# Altium PCB PCB2.PcbDoc
Units mm, origin at the board's own origin, x right, y up, seen from the top; angles counter-clockwise.
Board outline 80 x 60 mm, 2 copper layers (Top Layer, Bottom Layer); 28 components, 32 nets, 148 pads, 19 vias.
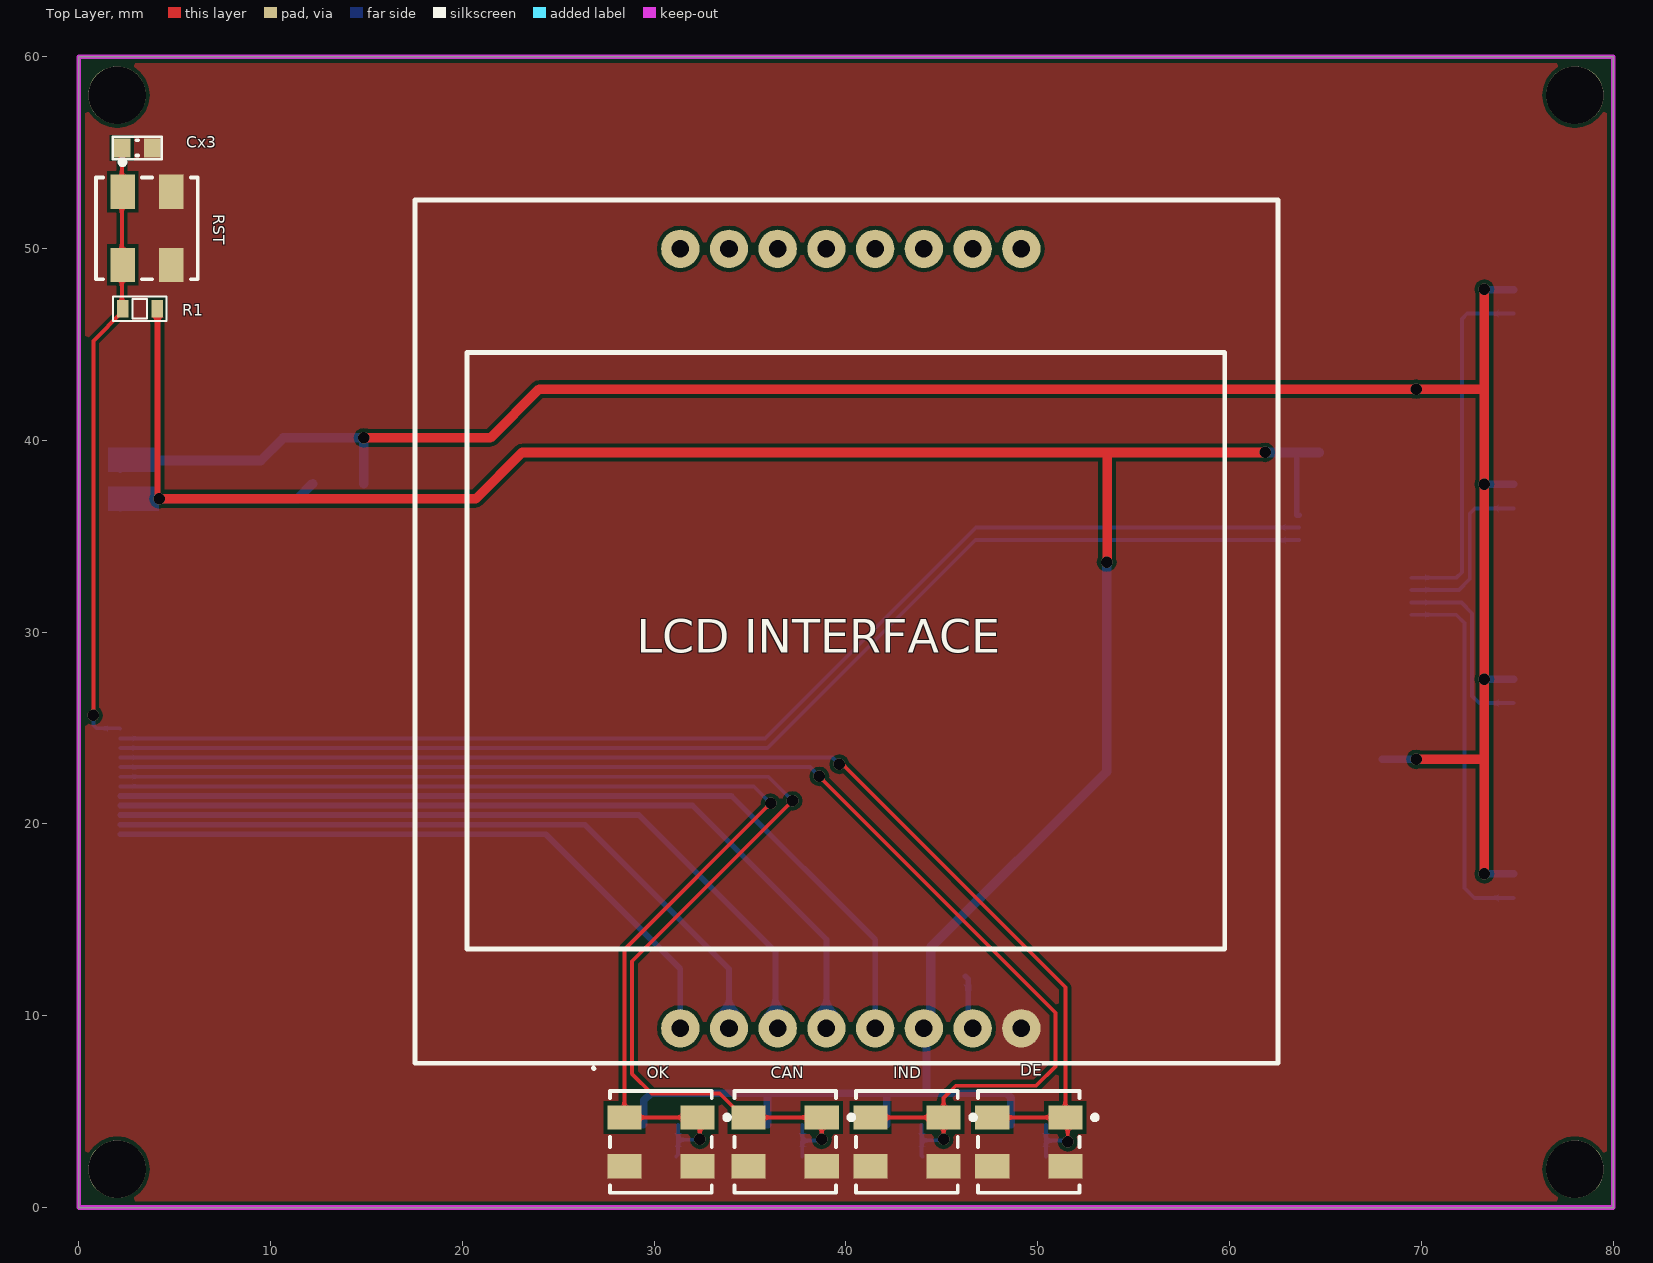
[diagram p0: Top Layer view]
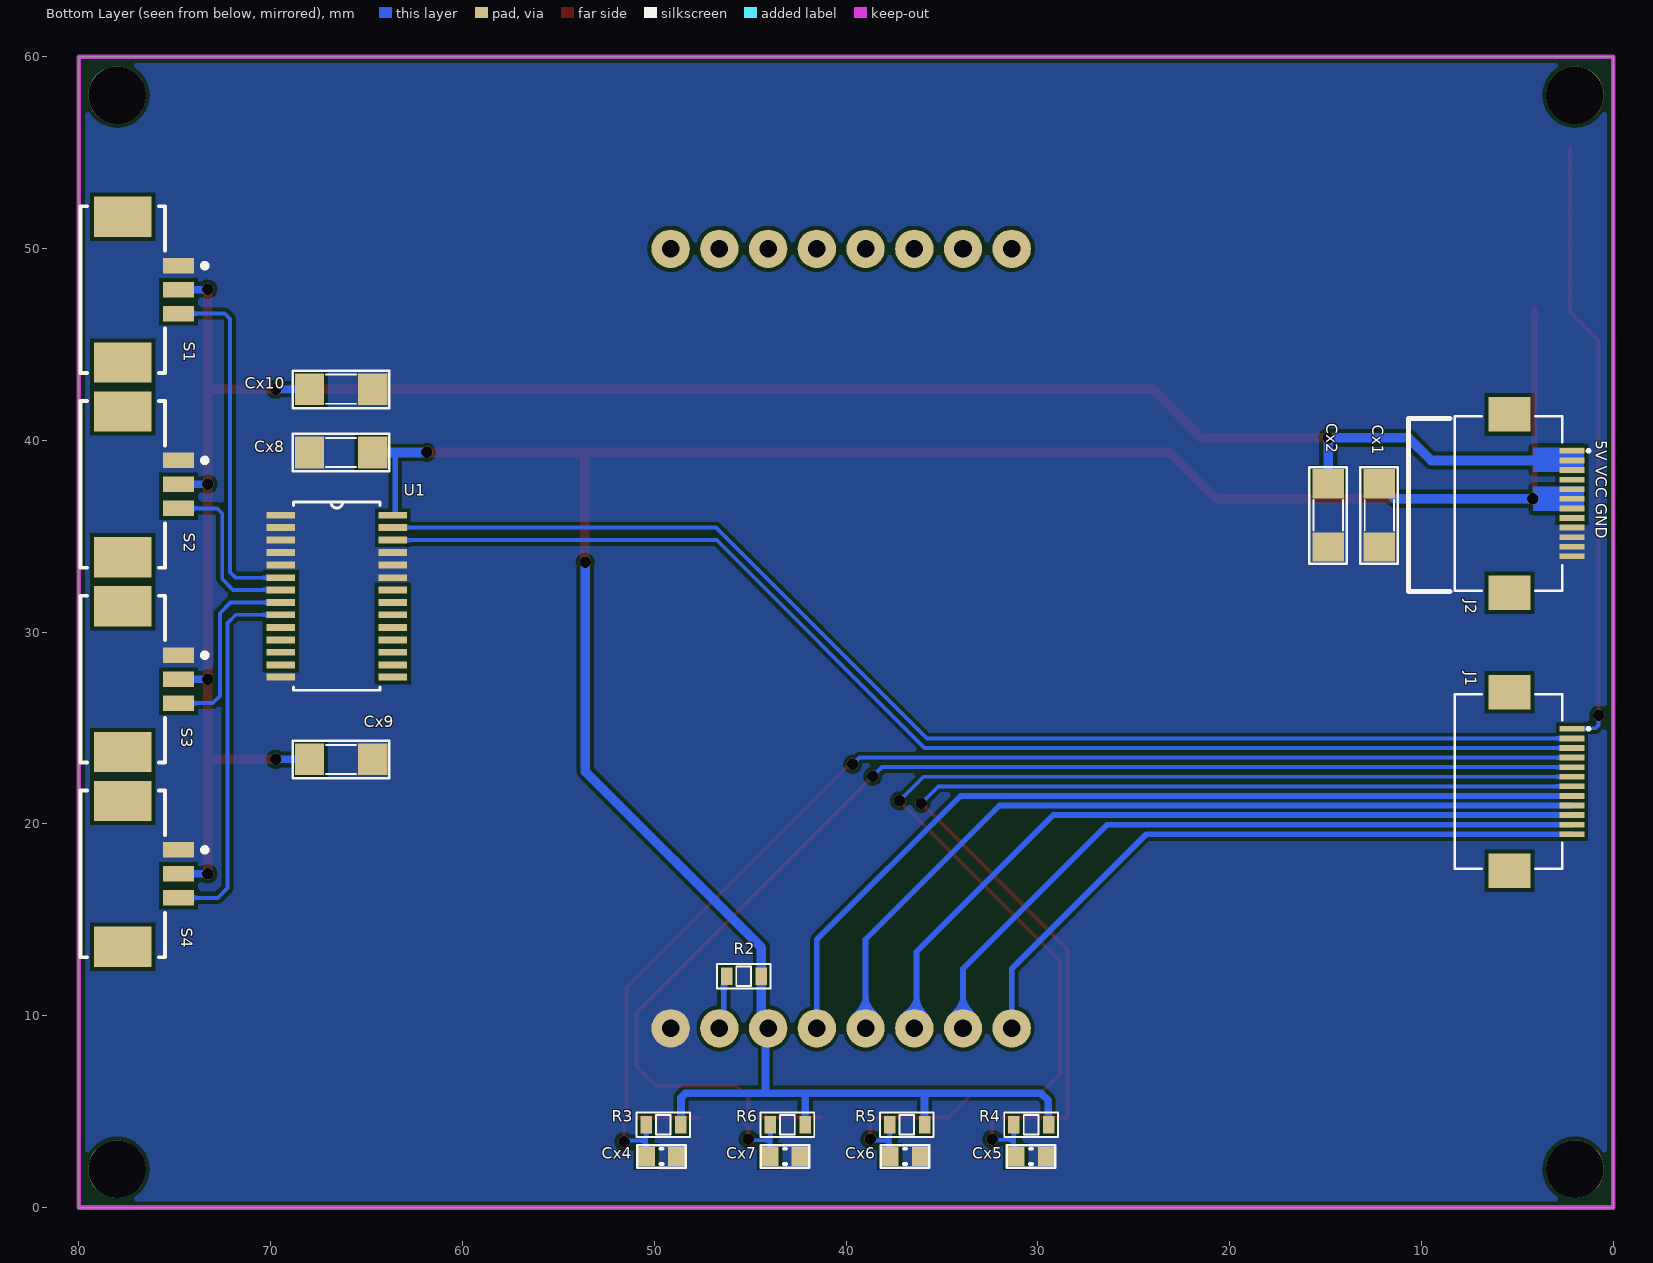
[diagram p1: Bottom Layer view, seen from below]
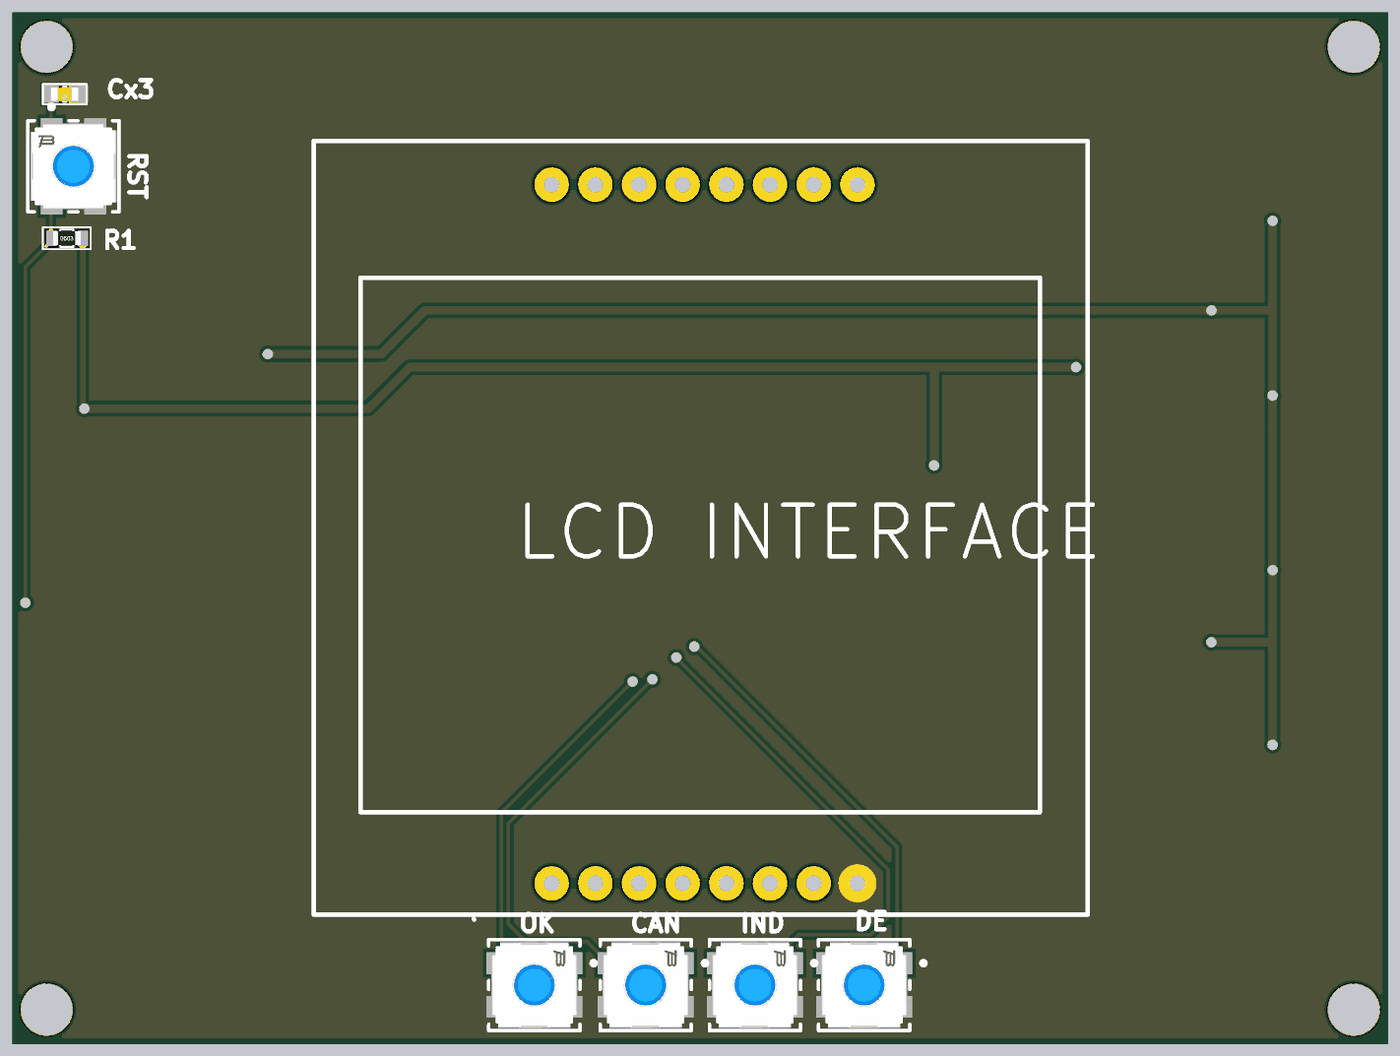
[diagram p2: 3D render of the assembled board from above, using the file's embedded part models]
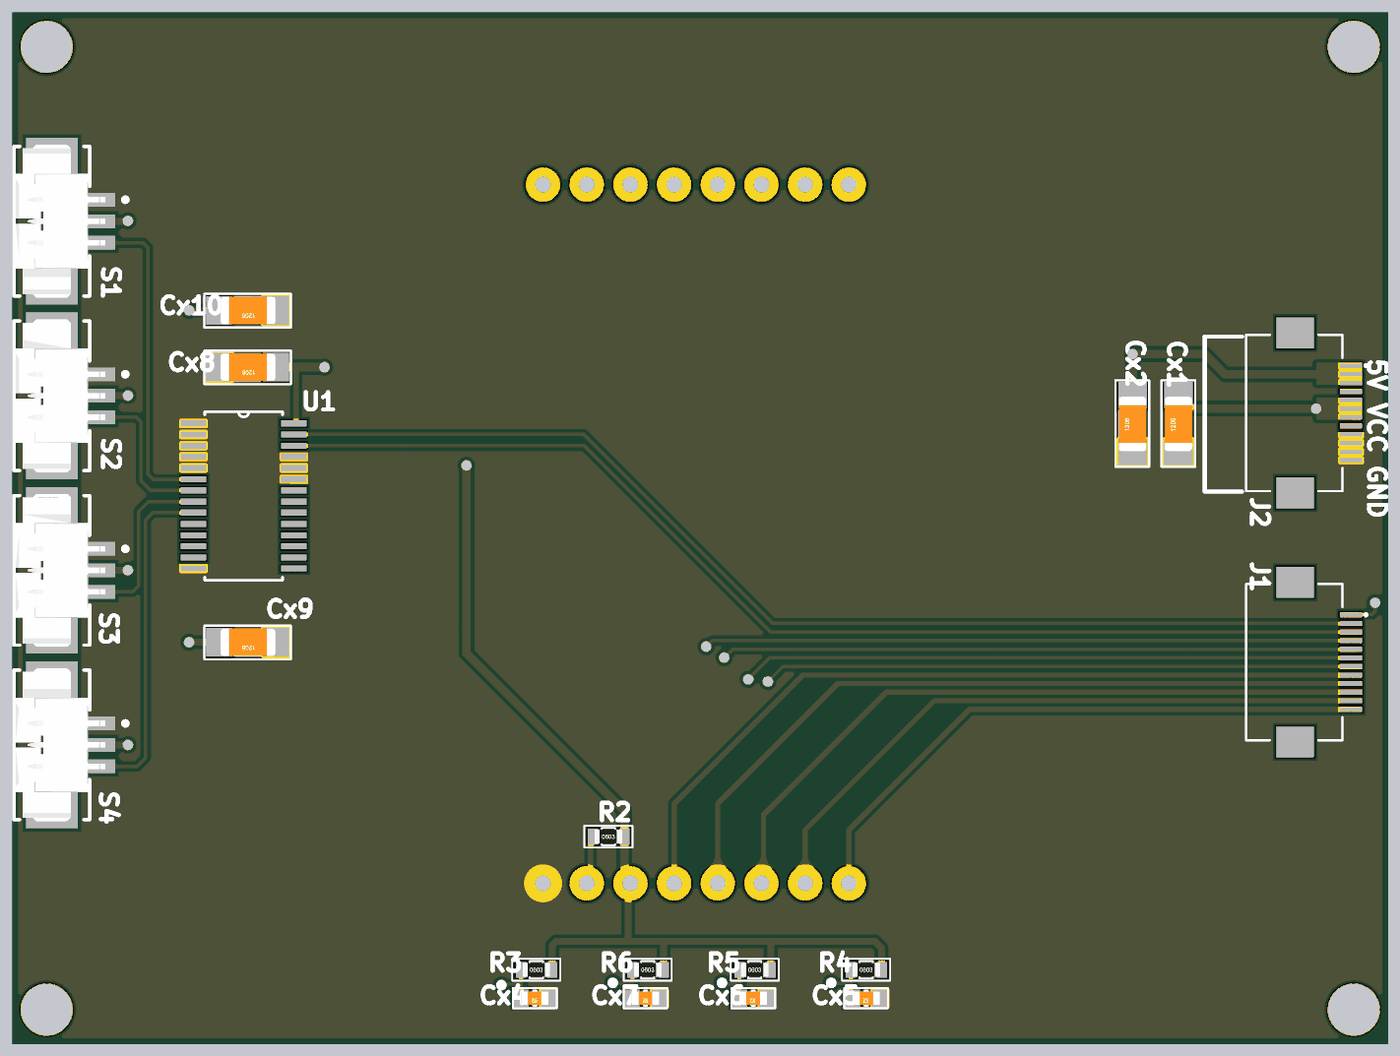
[diagram p3: 3D render of the assembled board from below, using the file's embedded part models]

## Layer stack, top to bottom
Top Solder: solder mask 0.0102, Solder Resist, Dk 3.5
Top Layer: signal copper 0.0356
Dielectric 1: dielectric 0.32, FR-4, Dk 4.8
Bottom Layer: signal copper 0.0356
Bottom Solder: solder mask 0.0102, Solder Resist, Dk 3.5

## Board outline
0,0 0,60 80,60 80,0

## Design rules (kind name [scope] priority, off if disabled: settings)
Clearance [All] p1: gap=0.2 ignorepadtopadclearanceinfootprint=FALSE
PlaneClearance [All] p1: clearance=0.5
PlaneConnect [All] p1: planeconnectstyle=Direct reliefexpansion=0.5 reliefentries=4 reliefconductorwidth=0.5 reliefairgap=0.5
PolygonConnect [All] p1: connectstyle=Direct reliefconductorwidth=0.254 reliefentries=4 polygonreliefangle="90 Angle" airgapwidth=0.254
RoutingVias [All] p1: holewidth=0.6 width=0.4 viastyle="Through Hole" minholewidth=0.6 minwidth=0.4 maxholewidth=0.6 maxwidth=0.4
SolderMaskExpansion [All] p1: expansion=0.102 istentingtop=FALSE
Width mcu [InNetClass('mcu')] p1: maxlimit=0.2 minlimit=0.2 preferedwidth=0.2
Width servo [InNetClass('SIGN_SERVO')] p2: maxlimit=0.2 minlimit=0.2 preferedwidth=0.2
Width BUTTON [InNetClass('BUTTON')] p3: maxlimit=0.3 minlimit=0.2 preferedwidth=0.3
Width lcd [InNetClass('LCD')] p4: maxlimit=0.3 minlimit=0.2 preferedwidth=0.3
Width p [InNetClass('POWER')] p5: maxlimit=0.5 minlimit=0.3 preferedwidth=0.4
28 further rules are at their usual default settings.

## Classes and differential pairs
net class mcu: EN SCL SDA
net class SIGN_SERVO: SERVO1 SeRVO2 SERVO3 SERVO4 SERVO5 SERVO6 SERVO7 SERVO8 SERVO9 SERVO10 SERVO11 SERVO12 SERVO13 SERVO14 SERVO15 SERVO16
component class Sheet3: Cx9 Cx10 S1 S2 S3 S4 U1
net class POWER: +5 VCC
net class BUTTON: SW_CANCEL SW_DE SW_IND SW_OK
net class LCD: LCD_BL LCD_CE LCD_CLK LCD_DC LCD_DIN LCD_RST
component class Sheet2: CAN Cx5 Cx6 Cx9 Cx10 DE IND J1 J2 OK R1 R3 R4 R5 R6 rst

## Components (designator, comment, footprint, x,y, rotation, side; value= is the part's Value field where it differs from the comment)
CAN "7914J-1-000" Bourns_Inc_0_MFG 36.83,3.429 r270 top (schematic designator SW5)
Cx1 "22u/10v" CN-SMD-1206 12.192,36.068 r90 bottom value=33pF
Cx2 "22u/10v" CN-SMD-1206 14.859,36.068 r90 bottom value=33pF
Cx3 "104" CN-SMD-0603 3.048,55.245 r180 top value=33pF
Cx4 "104" CN-SMD-0603 49.619,2.667 r0 bottom value=33pF
Cx5 "104" CN-SMD-0603 30.353,2.667 r0 bottom value=33pF
Cx6 "104" CN-SMD-0603 36.919,2.667 r0 bottom value=33pF
Cx7 "104" CN-SMD-0603 43.18,2.667 r0 bottom value=33pF
Cx8 "22u/10v" CN-SMD-1206 66.294,39.37 r0 bottom value=33pF
Cx9 "22u/10v" CN-SMD-1206 66.294,23.368 r0 bottom value=33pF
Cx10 "22u/10v" CN-SMD-1206 66.294,42.672 r0 bottom value=33pF
DE "7914J-1-000" Bourns_Inc_0_MFG 49.53,3.429 r270 top (schematic designator SW4)
IND "7914J-1-000" Bourns_Inc_0_MFG 43.18,3.429 r270 top (schematic designator SW3)
J1 "FH12-12S-0.5SH(55)" HIROSE_FH12-12S-0.5SH(55) 2.159,22.213 r270 bottom
J2 "FH12-12S-0.5SH(55)" HIROSE_FH12-12S-0.5SH(55) 2.159,36.703 r270 bottom
OK "7914J-1-000" Bourns_Inc_0_MFG 30.353,3.429 r270 top (schematic designator SW2)
R1 "10k" RES-SMD-0603 3.175,46.863 r0 top
R2 "220R" RES-SMD-0603 45.339,12.065 r180 bottom
R3 "10k" RES-SMD-0603 49.53,4.318 r180 bottom
R4 "10k" RES-SMD-0603 30.353,4.318 r180 bottom
R5 "10k" RES-SMD-0603 36.83,4.318 r180 bottom
R6 "10k" RES-SMD-0603 43.053,4.318 r180 bottom
RST "7914J-1-000" Bourns_Inc_0_MFG 3.556,51.054 r0 top (schematic designator SW1)
S1 "53261-0371" Molex_0_MFG 77.703,47.859 r270 bottom (schematic designator J3)
S2 "53261-0371" Molex_0_MFG 77.703,37.706 r270 bottom (schematic designator J4)
S3 "53261-0371" Molex_0_MFG 77.703,27.552 r270 bottom (schematic designator J5)
S4 "53261-0371" Molex_0_MFG 77.703,17.399 r270 bottom (schematic designator J6)
U1 "PCA9685PW,112" SOP65P640X110-28N 66.548,31.877 r180 bottom

## Footprints (in the part's own frame and the unit in brackets; to place one, negate y for a bottom-side part, rotate by r counter-clockwise, add the part's x,y. Pads: shape width x height; smd on the part's side, far side on the other; paste and mask are expansions set on the pad)
Bourns_Inc_0_MFG [mm]
  rect 1.27x1.78 smd paste+0 mask+0: 1_1-(-1.27,1.905) 1_2+(1.27,1.905) 2_1-(-1.27,-1.905) 2_2+(1.27,-1.905)
  silkscreen extent -2.65,-2.65 2.65,3.57, body extent -2.75,-2.9 2.75,2.9, height 0.25
CN-SMD-0603 [mm]
  rect 0.9x1 smd: 1(-0.8,0) 2(0.8,0)
  silkscreen extent -1.27,-0.58 1.27,0.58, body extent -0.8,-0.4 0.8,0.4, height 0.3
CN-SMD-1206 [mil]
  rect 60x65 smd: 1(-64,0) 2(66,0)
  silkscreen extent -98,-38 100,39, body extent -63,-31 63,31, height 40
HIROSE_FH12-12S-0.5SH(55) [mm]
  rect 0.3x1.3 smd paste-2: 1(-2.75,0) 2(-2.25,0) 3(-1.75,0) 4(-1.25,0) 5(-0.75,0) 6(-0.25,0) 7(0.25,0) 8(0.75,0) 9(1.25,0) 10(1.75,0) 11(2.25,0) 12(2.75,0)
  rect 1.8x2.2 smd: S1(-4.65,-3.25) S2(4.65,-3.25)
  silkscreen extent -4.55,-6.1 4.55,0.94
Molex_0_MFG [mm]
  rect 0.8x1.6 smd paste+0 mask+0: 1(-1.25,2.9) 2(0,2.9) 3(1.25,2.9)
  rect 2.1x3 smd paste+0 mask+0: 4(-3.8,0) 5(3.8,0)
  silkscreen extent -4.35,-2.2 4.35,4.4, body extent -4.45,-2.1 4.45,3.1, height 3.6
RES-SMD-0603 [mm]
  rect 0.6x0.9 smd: 1(-0.889,0) 2(0.927,0)
  silkscreen extent -1.4,-0.64 1.4,0.64, body extent -0.8,-0.4 0.8,0.4, height 0.43
SOP65P640X110-28N [mil]
  rect 58x14 smd: 1(-115,166) 2(-115,141) 3(-115,115) 4(-115,90) 5(-115,64) 6(-115,38) 7(-115,13) 8(-115,-13) 9(-115,-38) 10(-115,-64) 11(-115,-90) 12(-115,-115) 13(-115,-141) 14(-115,-166) 15(115,-166) 16(115,-141) 17(115,-115) 18(115,-90) 19(115,-64) 20(115,-38) 21(115,-13) 22(115,13) 23(115,38) 24(115,64) 25(115,90) 26(115,115) 27(115,141) 28(115,166)
  silkscreen extent -89,-193 89,193

## Part data
Cx1 Cx2 Cx3 Cx4 Cx5 Cx6 Cx7 Cx8 Cx9 Cx10: library part CN
J1 J2: "12 Position FFC, FPC Connector Contacts, Bottom 0.020 _0.50mm_ Surface Mount, Right Angle", Package=None, Availability=Unavailable, MF=Hirose, MP=FH12-12S-0.5SH_55_, Price=None, SnapEDA_Link=https://www.snapeda.com/parts/FH12-12S-0.5SH%2855%29/Hirose%20Electric%20Co%20Ltd/view-part/110249/?ref=snap
R1 R2 R3 R4 R5 R6: library part Res-SMD, "Resistor", Manufacturer="Generic Components", Class=Passive, Published=08/06/2000, Publisher="Altium Hobart Technology Centre"
U1: "LED Driver IC 16 Output Linear PWM Dimming 25mA 28-TSSOP", Package="TSSOP-28 NXP Semiconductors", Check_prices=https://www.snapeda.com/parts/PCA9685PW,112/NXP%20USA%20Inc./view-part/550390/?ref=eda, Digi-Key_Part_Number=568-8366-5-ND, MF="NXP USA", MP=PCA9685PW,112, Purchase-URL=https://pricing.snapeda.com/search/part/PCA9685PW,112/?ref=eda, SnapEDA_Link=https://www.snapeda.com/parts/PCA9685PW,112/NXP%20USA%20Inc./view-part/550390/?ref=snap

## Free pads (board coordinates)
  round 2 hole 0.914: 1(31.36,9.345) 2(33.9,9.345) 3(36.44,9.345) 4(38.98,9.345) 5(41.52,9.345) 6(44.06,9.345) 7(46.6,9.345) 8(49.14,9.345) 9(49.14,49.985) 10(46.6,49.985) 11(44.06,49.985) 12(41.52,49.985) 13(38.98,49.985) 14(36.44,49.985) 15(33.9,49.985) 16(31.36,49.985)
  round 3 hole 3: 17(2,2) 18(2,58) 19(78,58) 20(78,2)

## Via types
v1: diameter 0.6, hole 0.6, Top Layer to Bottom Layer, tented both sides, 19 vias

## Nets (pads, with @x,y where several pads share a name; then routed paths per layer and width w, separated by ;. In a path a pad name is that pad's centre, name@x,y a point inside that pad or via, vN(x,y) a via of type N, cw(c..) or ccw(c..) an arc to the next point about the centre after c; other vN are vias at no path point)
+5: Cx2.2 Cx9.2 Cx10.2 J2.1 J2.2 J2.3 S1.2 S2.2 S3.2 S4.2 | length 119.7
  Top Layer w0.5: v1(14.859,40.132) 21.463,40.132 24.003,42.672 v1(69.723,42.672) 73.152,42.672 73.279,42.799 ; v1(69.723,23.368) 73.279,23.368 ; v1(73.279,17.399) 73.279,23.368 ; v1(73.279,47.879) 73.279,42.799 ; 73.279,23.368 v1(73.279,27.559) v1(73.279,37.719) 73.279,42.799
  Bottom Layer w0.3: J2.3 J2.2 J2.1
  Bottom Layer w0.4: Cx9.2 v1(69.723,23.368) ; Cx10.2 v1(69.723,42.672) ; v1(73.279,17.399) S4.2 ; v1(73.279,27.559) 73.286,27.552 S3.2 ; v1(73.279,37.719) 73.292,37.706 S2.2 ; v1@73.279,47.859 S1.2
  Bottom Layer w0.5: J2.2 9.489,38.953 10.668,40.132 v1(14.859,40.132) Cx2.2
EN: Cx3.2 J1.1 R1.1 RST.1_1- RST.2_1- | length 32.2
  Top Layer w0.2: v1(0.762,25.663) 0.762,45.189 2.286,46.713 R1.1 2.248,46.901 Cx3.2
  Bottom Layer w0.2: v1(0.762,25.663) 0.762,25.146 0.917,24.991 2.131,24.991 J1.1
GND: CAN.1_2+ CAN.2_2+ Cx1.1 Cx2.1 Cx3.1 Cx4.1 Cx5.1 Cx6.1 Cx7.1 Cx8.2 Cx9.1 Cx10.1 DE.1_2+ DE.2_2+ IND.1_2+ IND.2_2+ J2.9 J2.10 J2.11 J2.12 OK.1_2+ OK.2_2+ pad.8 RST.1_2+ RST.2_2+ S1.1 S2.1 S3.1 S4.1 U1.1 U1.2 U1.3 U1.4 U1.5 U1.14 U1.23 U1.24 U1.25
LCD_BL: pad.7 R2.1 | length 2.9
  Bottom Layer w0.3: R2.1 46.378,11.915 46.378,9.568 pad.7
LCD_CE: J1.11 pad.2 | length 38
  Bottom Layer w0.3: J1.11 26.392,19.963 33.9,12.455 pad.2
LCD_CLK: J1.8 pad.5 | length 47.1
  Bottom Layer w0.3: J1.8 34.036,21.463 41.52,13.979 pad.5
LCD_DC: J1.10 pad.3 | length 41.2
  Bottom Layer w0.3: J1.10 29.194,20.463 36.322,13.335 36.322,9.464 pad.3
LCD_DIN: J1.9 pad.4 | length 44.3
  Bottom Layer w0.3: J1.9 31.996,20.963 38.98,13.979 pad.4
LCD_RST: J1.12 pad.1 | length 35.2
  Bottom Layer w0.3: J1.12 24.352,19.463 31.36,12.455 pad.1
SCL: J1.3 U1.26 | length 66
  Bottom Layer w0.2: J1.3 35.901,23.963 46.736,34.798 U1.26
SDA: J1.2 U1.27 | length 66
  Bottom Layer w0.2: J1.2 35.785,24.463 46.781,35.458 U1.27
SERVO1: S1.3 U1.6 | length 18.8
  Bottom Layer w0.2: U1.6 71.831,32.842 72.117,33.128 72.117,46.336 72.39,46.609 S1.3
SeRVO2: S2.3 U1.7 | length 9.1
  Bottom Layer w0.2: U1.7 71.958,32.207 72.517,32.766 72.517,36.195 72.778,36.456 S2.3
SERVO3: S3.3 U1.8 | length 10
  Bottom Layer w0.2: U1.8 72.085,31.547 72.644,30.988 72.644,26.67 73.012,26.302 S3.3
SERVO4: S4.3 U1.9 | length 19.5
  Bottom Layer w0.2: U1.9 71.812,30.912 72.244,30.48 72.244,16.656 72.751,16.149 S4.3
SERVO5: U1.10
SERVO6: U1.11
SERVO7: U1.12
SERVO8: U1.13
SERVO9: U1.15
SERVO10: U1.16
SERVO11: U1.17
SERVO12: U1.18
SERVO13: U1.19
SERVO14: U1.20
SERVO15: U1.21
SERVO16: U1.22
SW_CANCEL: CAN.1_1- CAN.2_1- Cx6.2 J1.6 R5.1 | length 67.9
  Top Layer w0.2: CAN.2_1-@34.135,5.234 34.67,4.699 CAN.2_1- CAN.1_1- v1(38.735,3.556) ; CAN.2_1-@34.135,5.235 33.42,5.95 29.873,5.95 28.848,6.975 28.848,12.846 v1(37.211,21.209)
  Bottom Layer w0.2: J1.6 35.957,22.463 v1(37.211,21.209) ; Cx6.2 37.719,3.492 ; R5.1 37.719,3.492 ; v1(38.735,3.556) 38.671,3.492 37.719,3.492
SW_DE: Cx4.2 DE.1_1- DE.2_1- J1.4 R3.1 | length 69
  Top Layer w0.2: v1(39.653,23.114) 39.809,23.114 51.435,11.488 DE.1_1- ; DE.2_1- DE.1_1- ; v1(51.562,3.429) 51.562,4.572 DE.1_1-
  Bottom Layer w0.2: J1.4 39.304,23.463 v1(39.653,23.114) ; Cx4.2 50.419,3.492 ; R3.1 50.419,3.492 ; v1(51.562,3.429) 51.499,3.492 50.419,3.492
SW_IND: Cx7.2 IND.1_1- IND.2_1- J1.5 R6.1 | length 72.4
  Top Layer w0.2: v1(38.608,22.479) 50.927,10.16 50.927,7.366 49.911,6.35 45.72,6.35 45.085,5.715 IND.1_1- ; IND.2_1- IND.1_1- ; v1(45.085,3.556) 45.085,4.191 45.339,4.445 IND.1_1-
  Bottom Layer w0.2: J1.5 38.124,22.963 v1(38.608,22.479) ; R6.1 43.942,3.511 ; Cx7.2 43.942,2.705 43.942,3.511 ; v1(45.085,3.556) 45.04,3.511 43.942,3.511
SW_OK: Cx5.2 J1.7 OK.1_1- OK.2_1- R4.1 | length 61.7
  Top Layer w0.2: v1(32.385,3.556) 32.385,4.572 OK.1_1- OK.2_1- 28.448,13.462 v1(36.068,21.082)
  Bottom Layer w0.2: J1.7 35.187,21.963 v1(36.068,21.082) ; Cx5.2 31.242,2.756 31.242,3.537 ; R4.1 31.242,3.537 ; v1(32.385,3.556) 32.366,3.537 31.242,3.537
VCC: Cx1.2 Cx8.1 J2.5 J2.6 J2.7 pad.6 R1.2 R2.2 R3.2 R4.2 R5.2 R6.2 U1.28 | length 149
  Top Layer w0.3: R1.2 4.102,37.046 v1(4.191,36.957)
  Top Layer w0.5: v1(4.191,36.957) 20.701,36.957 23.114,39.37 53.613,39.37 ; v1(53.594,33.655) 53.613,33.674 53.613,39.37 ; v1(61.849,39.37) 53.613,39.37
  Bottom Layer w0.3: J2.7 J2.6 J2.5 ; 63.5,39.37 63.5,36.121 63.528,36.093 U1.28
  Bottom Layer w0.4: R4.2 29.464,4.356 29.464,5.588 29.845,5.969 35.941,5.969 ; R5.2 35.903,5.931 35.941,5.969 ; R6.2 42.126,5.94 42.155,5.969 ; pad.6 44.196,9.21 44.196,5.969 ; R3.2 48.603,5.735 48.369,5.969 44.196,5.969 ; 35.941,5.969 42.155,5.969 ; 42.155,5.969 44.196,5.969
  Bottom Layer w0.5: J2.6 4.187,36.953 v1(4.191,36.957) 11.405,36.957 Cx1.2 ; pad.6 44.06,9.751 44.412,10.103 R2.2 44.412,13.551 53.594,22.733 v1(53.594,33.655) ; v1(61.849,39.37) 63.5,39.37 Cx8.1
pads on no net: J1.S1 J1.S2 J2.4 J2.8 J2.S1 J2.S2 S1.4 S1.5 S2.4 S2.5 S3.4 S3.5 S4.4 S4.5

## Polygon pours and split planes (outlines as drawn)
GND on Top Layer "GND_L01_P000" (solid, remove dead copper, pour order 0): 0,0 0,60 80,60 80,0
GND on Bottom Layer "GND_L02_P002" (solid, remove dead copper, pour order 2): 0,0 0,60 80,60 80,0

## Keep-outs
Keep-Out Layer:
  the board outline again, w0.254

## Other copper
Bottom Layer:
  rectangle net +5: 1.524,38.354 4.191,39.624
  rectangle net VCC: 1.524,36.322 4.187,37.592

## Silkscreen, mask and mechanical layers (free items; w line width, h text height)
Top Overlay:
  lines w0.254: 26.829,7.273 26.859,7.24 ; 17.525,7.525 17.525,52.525 62.525,52.525 62.525,7.525 17.525,7.525 ; 20.249,13.481 20.249,44.58 59.747,44.58 59.747,13.481 20.249,13.481
  text "LCD INTERFACE" at 29.083,28.353 h3
Bottom Overlay:
  lines w0.254: 8.509,32.131 10.668,32.131 10.668,41.148 8.509,41.148
  text "5V VCC GND" at 1.131,40.005 h1 r90
Mechanical 15:
  lines w0.003: 40,30 40.051,30.051